# EAGLE board board comp 2-27-12 (EAGLE 6.3), part 1 of 2
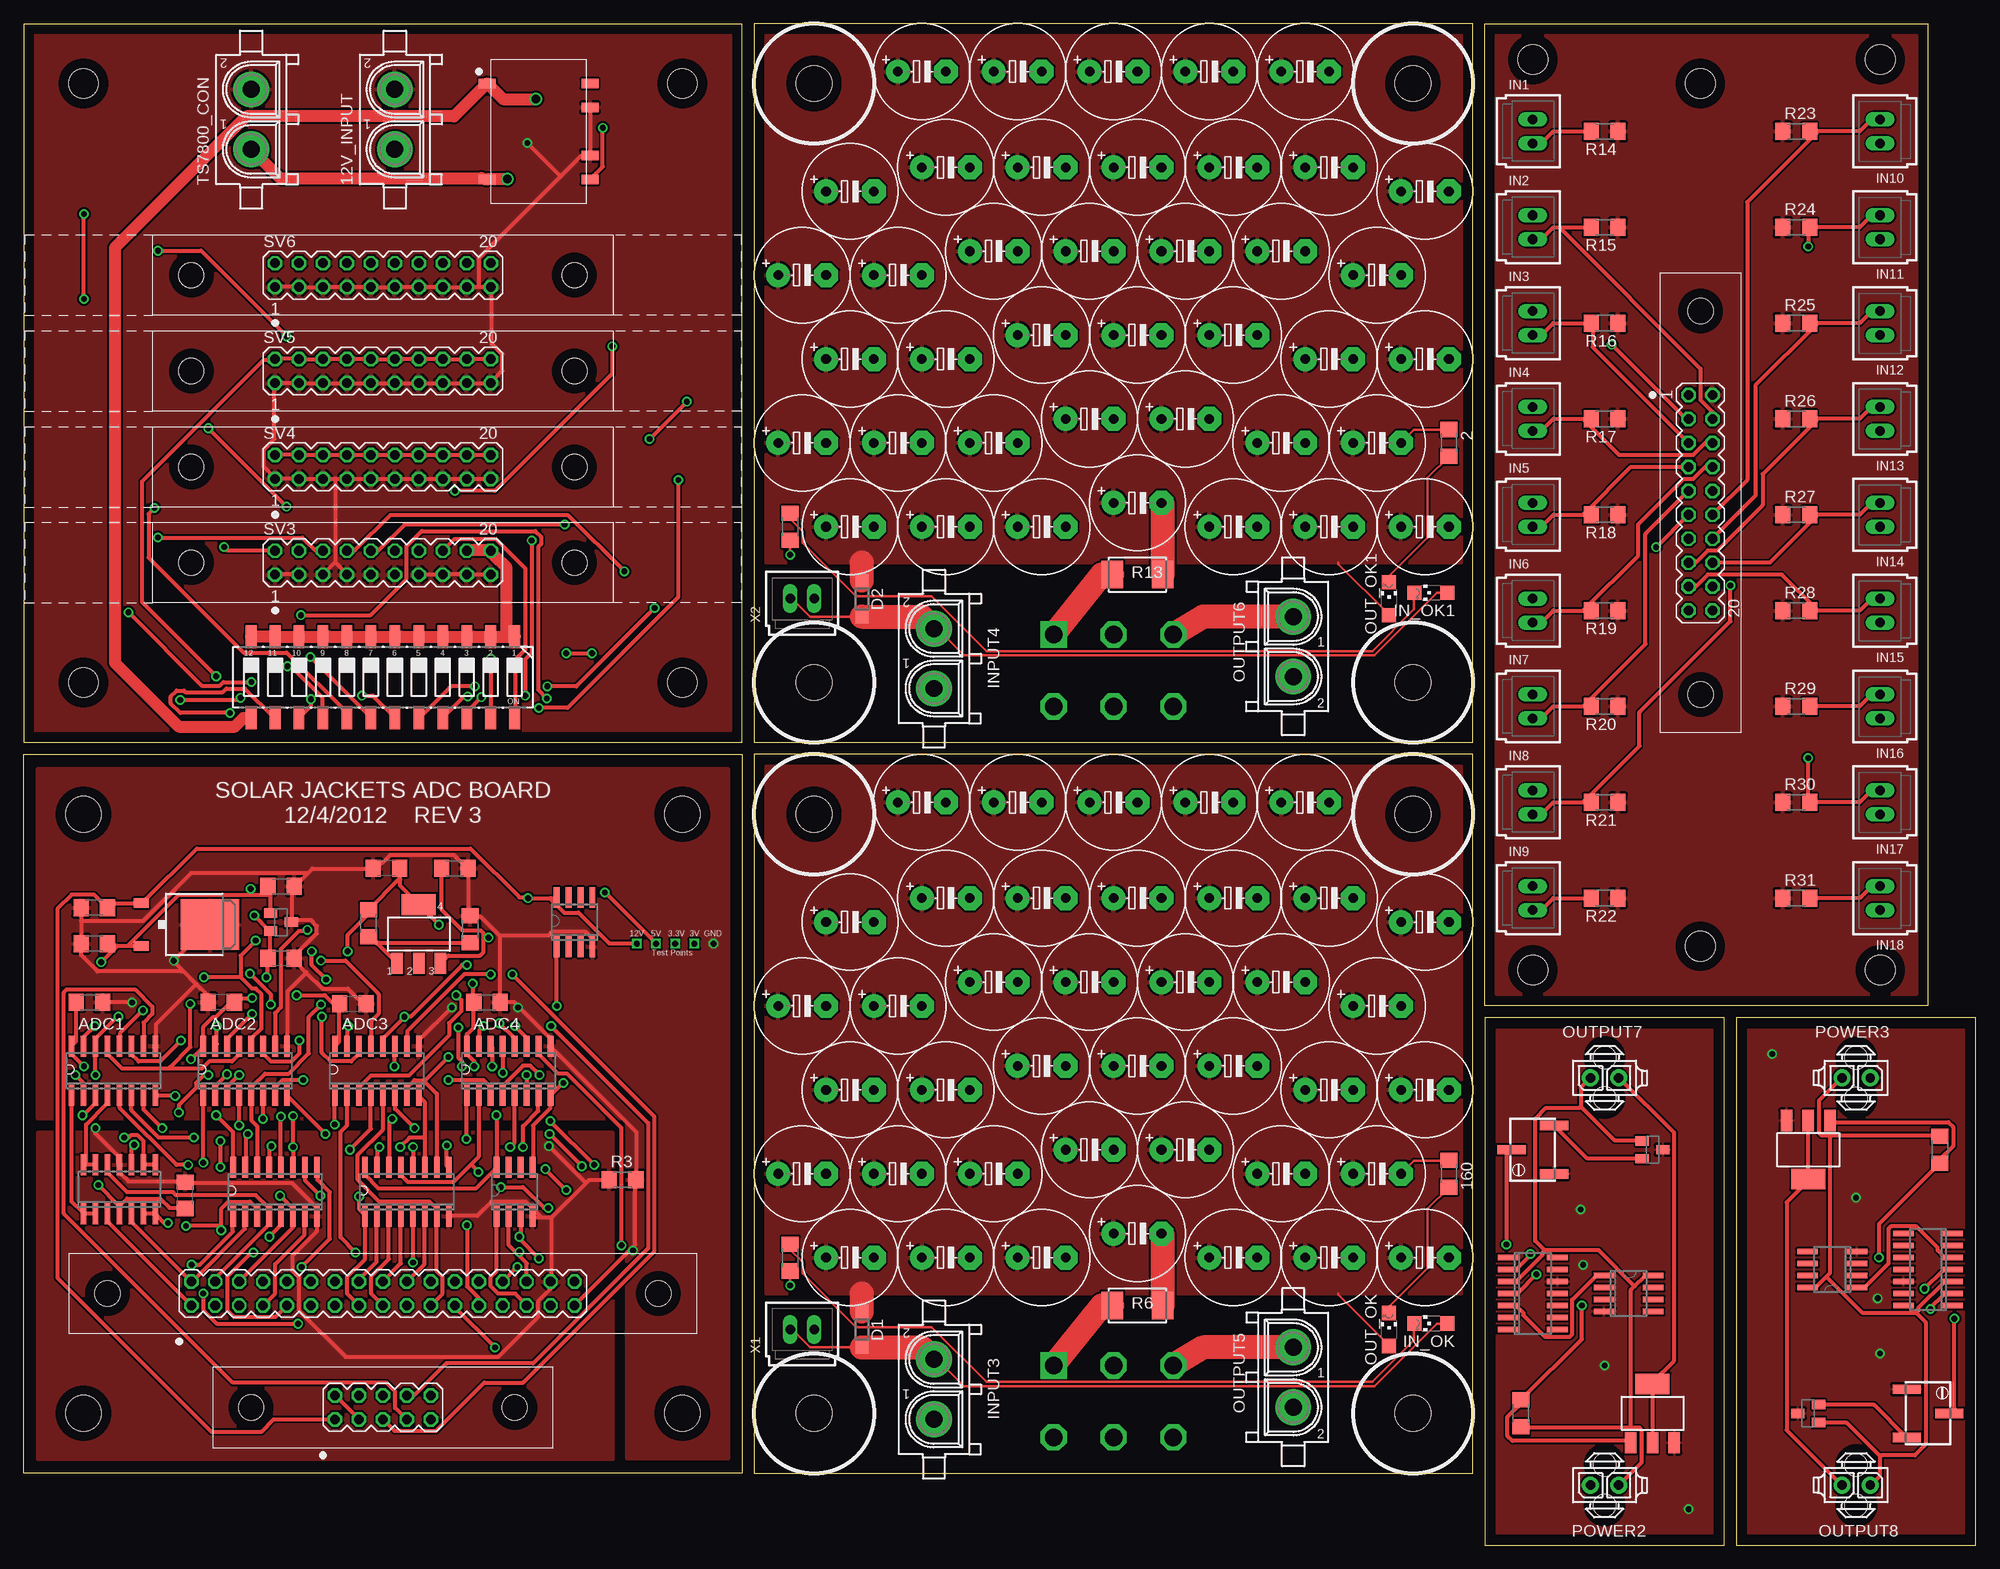
[diagram p0: board, top side]
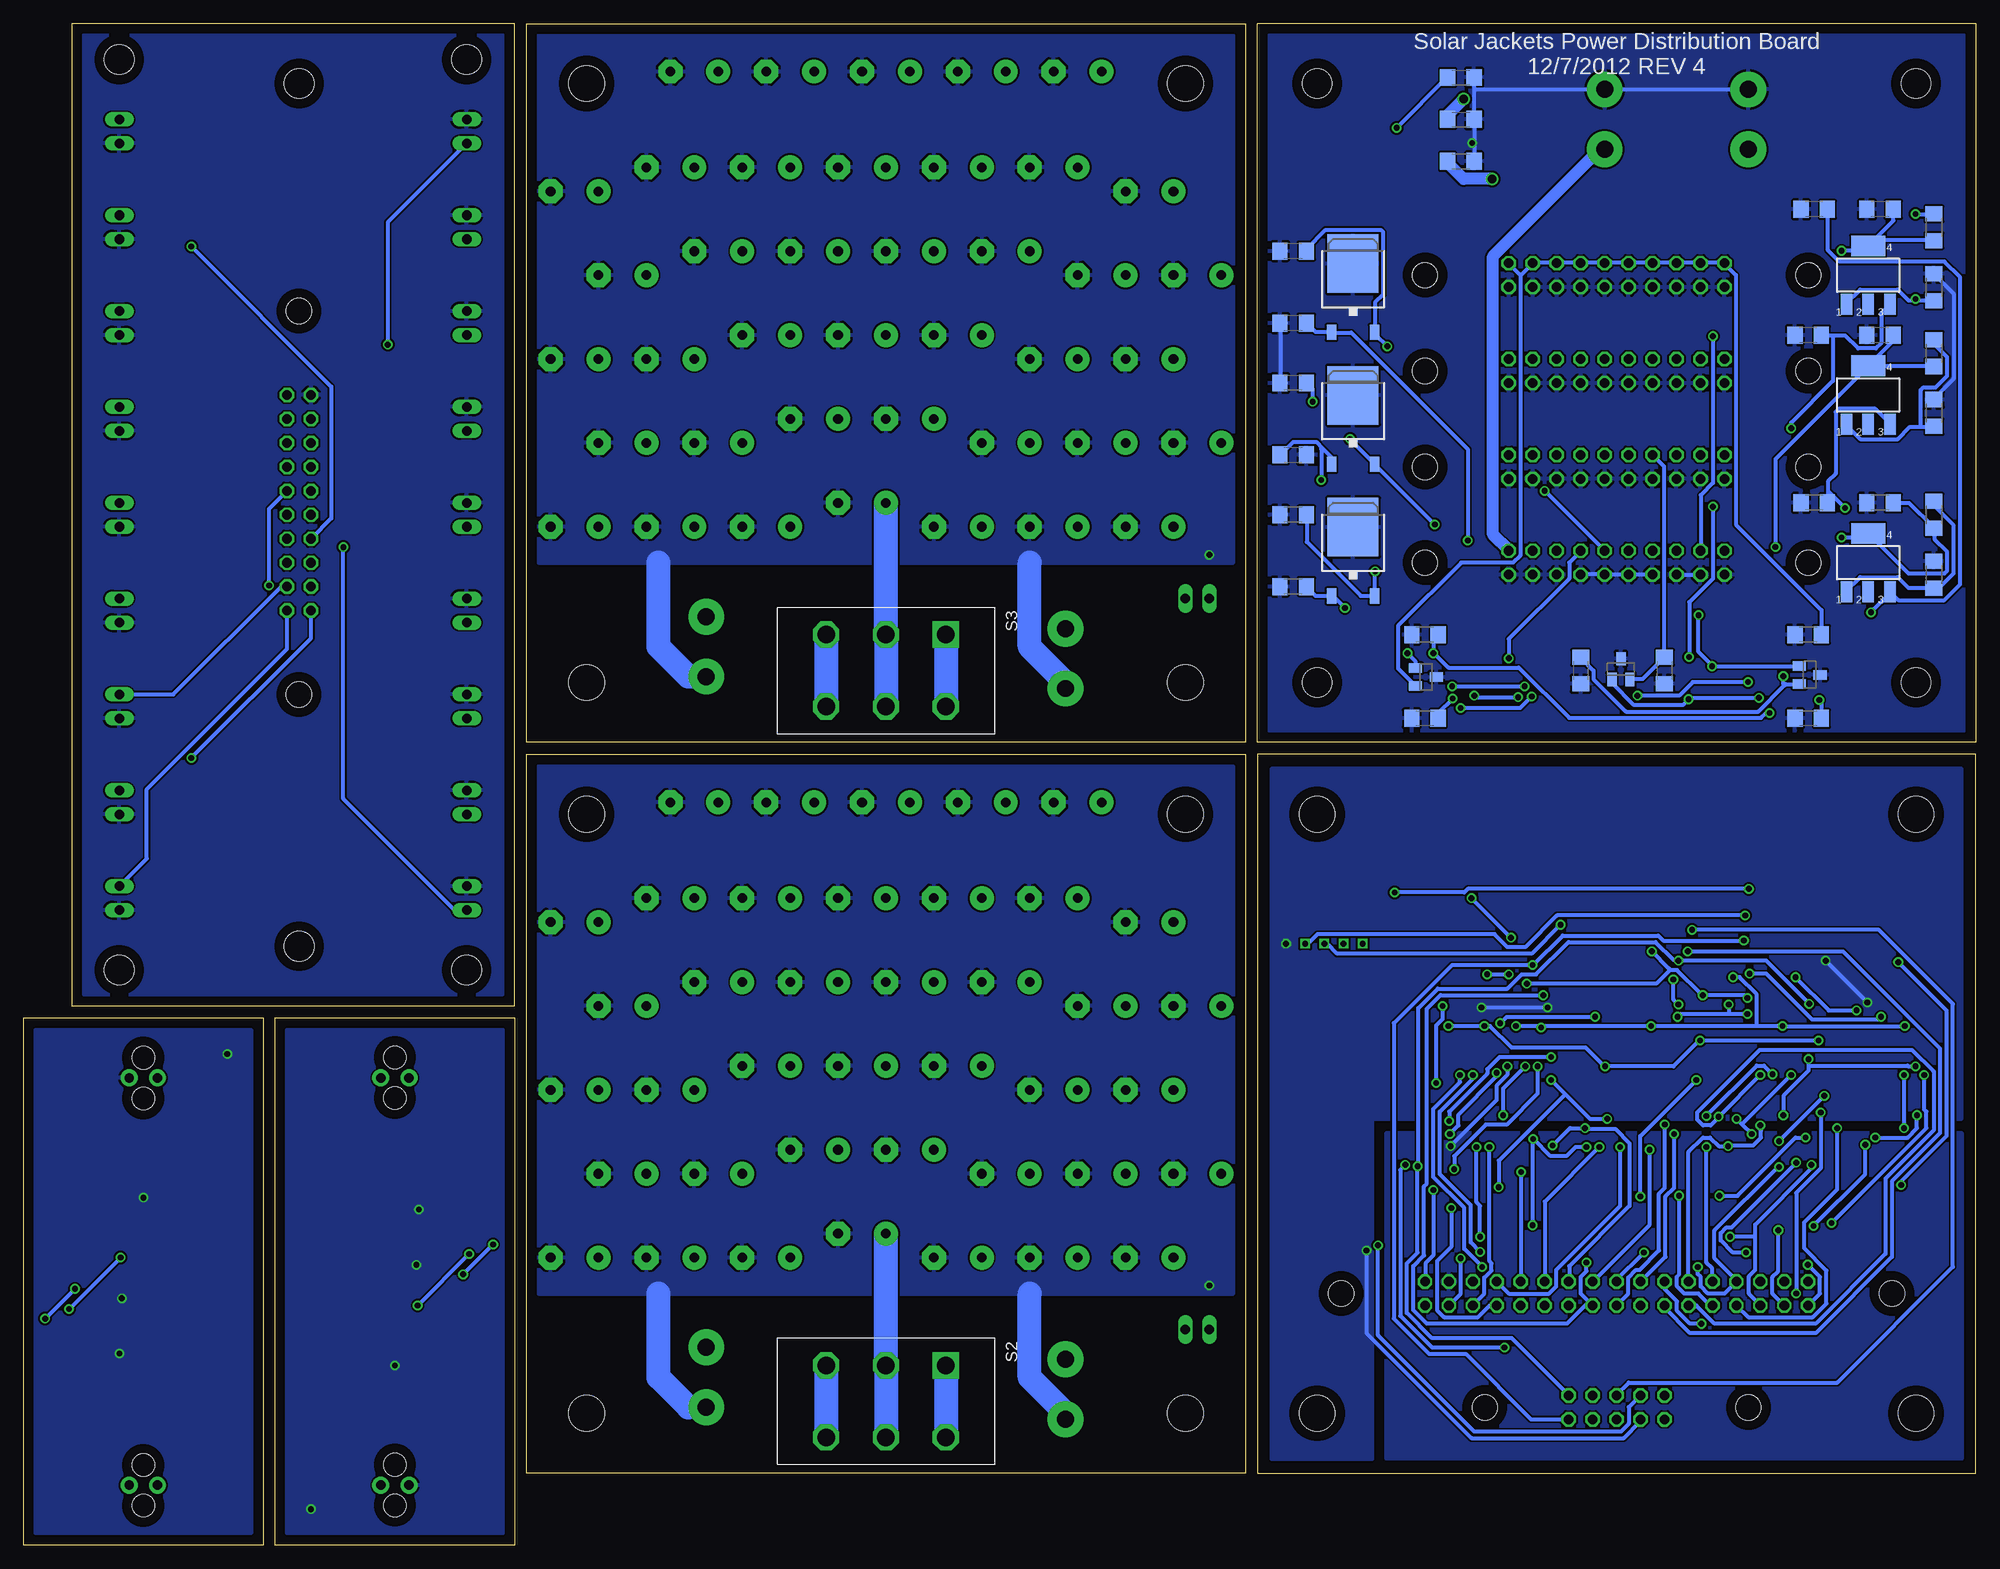
[diagram p1: board, bottom side, seen from below]

Size 207.01 x 161.29 mm. Coordinates in mm from the lower left corner, seen from the top.
Outline: 0,7.62 0,83.82 76.2,83.82 76.2,7.62 0,7.62
Outline: 76.2,85.09 76.2,161.29 0,161.29 0,85.09 76.2,85.09
Outline: 77.47,7.62 153.67,7.62 153.67,83.82 77.47,83.82 77.47,7.62
Outline: 77.47,85.09 153.67,85.09 153.67,161.29 77.47,161.29 77.47,85.09
Outline: 154.94,57.15 154.94,161.29 201.93,161.29 201.93,57.15 154.94,57.15
Outline: 154.94,55.88 154.94,0 180.34,0 180.34,55.88 154.94,55.88
Outline: 207.01,0 207.01,55.88 181.61,55.88 181.61,0 207.01,0
Copper layers (1*16): Top 0.035mm / dielectric 1.5mm / Bottom 0.035mm
Design rules "default": minimum track width 10mil, minimum drill 24mil, track to track 8mil, track to pad 8mil, pad to pad 8mil, via to via 8mil, smd to smd 8mil, copper to edge 40mil, drill to drill 8mil, minimum pad ring 10mil, minimum via ring 8mil, stop-mask expansion 4mil, vias tented up to drill 0mil, thermal gap 10mil
Net classes: 1 power: width 1.27 mm, drill 0.889 mm
Holes 3.81 mm at 69.85,77.47 6.35,77.47 69.85,13.97 6.35,13.97 83.82,13.97 83.82,77.47 147.32,77.47 147.32,13.97 83.82,91.44 83.82,154.94 147.32,154.94 147.32,91.44
Holes 3.17 mm at 69.85,91.44 6.35,91.44 6.35,154.94 69.85,154.94 160.02,60.96 196.85,60.96 160.02,157.48 196.85,157.48 177.8,154.94 177.8,63.5

## Footprints (pad centres in the part's own frame; a part is rotated, then mirrored left to right if it is on the bottom)
R1206 = smd 1.6 x 1.803: 1 -1.422,0; 2 1.422,0
SOT23 = smd 1 x 1.4: 1 -0.95,-1.1; 2 0.95,-1.1; 3 0,1.1
TO252 = smd 1 x 1.6: 1 -2.28,-4.8; 2 2.28,-4.8 | smd 5.4 x 6.2: 3 0,2.5
350759-4 = drill 1.8 pad 3.81: 1 -3.175,0; 2 3.175,0
C1206 = smd 1.6 x 1.8: 1 -1.4,0; 2 1.4,0
SO16 = smd 0.6 x 2.2: 1 -4.445,-2.6; 2 -3.175,-2.6; 3 -1.905,-2.6; 4 -0.635,-2.6; 5 0.635,-2.6; 6 1.905,-2.6; 7 3.175,-2.6; 8 4.445,-2.6; 9 4.445,2.6; 10 3.175,2.6; 11 1.905,2.6; 12 0.635,2.6; 13 -0.635,2.6; 14 -1.905,2.6; 15 -3.175,2.6; 16 -4.445,2.6
E5-10,5 = drill 1.016 pad 2.54: + -2.54,0 | drill 1.016 pad 2.54 octagon: - 2.54,0
SOD123 = smd 1.4 x 1.4: A 1.9,0; C -1.9,0
SOT223 = smd 1.219 x 2.235: 1 -2.311,-3.099; 2 0,-3.099; 3 2.311,-3.099 | smd 3.6 x 2.2: 4 0,3.099
SO14 = smd 0.6 x 2.2: 1 -3.81,-2.6; 2 -2.54,-2.6; 3 -1.27,-2.6; 4 0,-2.6; 5 1.27,-2.6; 6 2.54,-2.6; 7 3.81,-2.6; 8 3.81,2.6; 9 2.54,2.6; 10 1.27,2.6; 11 0,2.6; 12 -1.27,2.6; 13 -2.54,2.6; 14 -3.81,2.6
70543-02 = drill 1.016 long: 1 -1.27,0; 2 1.27,0
CHIPLED_1206 = smd 1.5 x 1.5: A 0,-1.75; C 0,1.75
350428-1 = drill 1.8 pad 3.81: 1 -3.175,0; 2 3.175,0
794681-2 = drill 1 pad 1.778: 1 0,-1.5; 2 0,1.5 | hole 2.4: 2.13,0; -2.17,0
WSC2515 = smd 2.29 x 2.92: 1 -2.675,0; 2 2.675,0
RTRIMTS63Y = smd 1 x 3: 1 -2.55,-2.25; 2 0,2.25; 3 2.55,-2.25
CTS-219-12 = smd 1.13 x 2.44: 1 -13.97,-4.3; 2 -11.43,-4.3; 3 -8.89,-4.3; 4 -6.35,-4.3; 5 -3.81,-4.3; 6 -1.27,-4.3; 7 1.27,-4.3; 8 3.81,-4.3; 9 6.35,-4.3; 10 8.89,-4.3; 11 11.43,-4.3; 12 13.97,-4.3; 13 13.97,4.3; 14 11.43,4.3; 15 8.89,4.3; 16 6.35,4.3; 17 3.81,4.3; 18 1.27,4.3; 19 -1.27,4.3; 20 -3.81,4.3; 21 -6.35,4.3; 22 -8.89,4.3; 23 -11.43,4.3; 24 -13.97,4.3
SLIDE_SWITCH = drill 1.854 square: 1 -3.81,6.35 | drill 1.854 octagon: 2 -3.81,0; 3 -3.81,-6.35; 4 3.81,-6.35; 5 3.81,0; 6 3.81,6.35
MA17-2 = drill 1.016 octagon: 1 -20.32,-1.27; 2 -20.32,1.27; 3 -17.78,-1.27; 4 -17.78,1.27; 5 -15.24,-1.27; 6 -15.24,1.27; 7 -12.7,-1.27; 8 -12.7,1.27; 9 -10.16,-1.27; 10 -10.16,1.27; 11 -7.62,-1.27; 12 -7.62,1.27; 13 -5.08,-1.27; 14 -5.08,1.27; 15 -2.54,-1.27; 16 -2.54,1.27; 17 0,-1.27; 18 0,1.27; 19 2.54,-1.27; 20 2.54,1.27; 21 5.08,-1.27; 22 5.08,1.27; 23 7.62,-1.27; 24 7.62,1.27; 25 10.16,-1.27; 26 10.16,1.27; 27 12.7,-1.27; 28 12.7,1.27; 29 15.24,-1.27; 30 15.24,1.27; 31 17.78,-1.27; 32 17.78,1.27; 33 20.32,-1.27; 34 20.32,1.27 | hole 2.692: -29.21,0; 29.21,0
MA05-2 = drill 1.016 octagon: 1 -5.08,-1.27; 2 -5.08,1.27; 3 -2.54,-1.27; 4 -2.54,1.27; 5 0,-1.27; 6 0,1.27; 7 2.54,-1.27; 8 2.54,1.27; 9 5.08,-1.27; 10 5.08,1.27 | hole 2.692: -13.97,0; 13.97,0
MA10-2 = drill 1.016 octagon: 1 -11.43,-1.27; 2 -11.43,1.27; 3 -8.89,-1.27; 4 -8.89,1.27; 5 -6.35,-1.27; 6 -6.35,1.27; 7 -3.81,-1.27; 8 -3.81,1.27; 9 -1.27,-1.27; 10 -1.27,1.27; 11 1.27,-1.27; 12 1.27,1.27; 13 3.81,-1.27; 14 3.81,1.27; 15 6.35,-1.27; 16 6.35,1.27; 17 8.89,-1.27; 18 8.89,1.27; 19 11.43,-1.27; 20 11.43,1.27 | hole 2.692: -20.32,0; 20.32,0
V7805 = smd 0.991 x 1.803: 1 0,0.902; 5 10.16,0.902; 6 10.16,11.798; 7 7.62,11.798; 9 2.54,11.798; 10 0,11.798
SO-08 = smd 0.6 x 2.2: 1 -1.905,-2.6; 2 -0.635,-2.6; 3 0.635,-2.6; 4 1.905,-2.6; 5 1.905,2.6; 6 0.635,2.6; 7 -0.635,2.6; 8 -1.905,2.6

## Placement (x,y rotation side)
1  160  [R1206]  81.28,30.48 90 top
2  [R1206]  151.13,116.84 270 top
3  160  [R1206]  81.28,107.95 90 top
3V  MAX6103  [SOT23]  27.3,66.04 270 top
3V3  MAX6103  [SOT23]  17.63,92.25 270 bottom
3V4  MAX6103  [SOT23]  37.64,92.86 0 bottom
3V5  MAX6103  [SOT23]  58.32,92.02 270 bottom
5V  LM7805TV  [TO252]  17.27,65.79 270 top
12V_INPUT  350759-4  [350759-4]  39.37,151.13 90 top
160  [R1206]  151.13,39.37 270 top
317CAP1  .33uF  [C1206]  45.72,71.76 0 top
317CAP2  1uF  [C1206]  38.48,71.76 180 top
317CAP3  .33uF  [C1206]  17.14,141.61 180 bottom
317CAP8  1uF  [C1206]  10.16,110.49 180 bottom
317CAP9  .33uF  [C1206]  17.78,128.27 180 bottom
317CAP10  1uF  [C1206]  10.16,141.61 180 bottom
317CAP11  .33uF  [C1206]  17.14,110.49 180 bottom
317CAP12  1uF  [C1206]  10.16,128.27 180 bottom
6103CAP1  1uF  [C1206]  27.3,69.85 0 top
6103CAP2  1uF  [C1206]  27.3,62.23 0 top
6103CAP7  1uF  [C1206]  58.42,87.63 180 bottom
6103CAP8  1uF  [C1206]  41.91,92.71 270 bottom
6103CAP9  1uF  [C1206]  17.78,87.63 180 bottom
6103CAP10  1uF  [C1206]  33.02,92.71 270 bottom
6103CAP11  1uF  [C1206]  58.42,96.52 180 bottom
6103CAP12  1uF  [C1206]  17.78,96.52 180 bottom
6484CAP1  .1uF  [C1206]  17.14,37.08 90 top
7805CAP1  .33uF  [C1206]  7.49,67.56 180 top
7805CAP2  1uF  [C1206]  7.49,63.75 180 top
ADC1  MCP-3008  [SO16]  9.53,50.29 0 top
ADC2  MCP-3008  [SO16]  23.5,50.29 0 top
ADC3  MCP-3008  [SO16]  37.47,50.29 0 top
ADC4  MCP-3008  [SO16]  51.44,50.29 0 top
ADC_CAP1  .1uF  [C1206]  6.99,57.53 0 top
ADC_CAP2  .1uF  [C1206]  20.95,57.53 180 top
ADC_CAP3  .1uF  [C1206]  34.92,57.4 0 top
ADC_CAP4  .1uF  [C1206]  49.15,57.53 0 top
C1  1uF  [C1206]  72.39,129.54 180 bottom
C2  1uF  [C1206]  72.39,137.16 180 bottom
C3  1uF  [C1206]  72.39,115.57 0 bottom
C4  1uF  [C1206]  72.39,123.19 180 bottom
C5  1uF  [C1206]  72.39,101.6 180 bottom
C6  1uF  [C1206]  72.39,109.22 180 bottom
C34  [E5-10,5]  95.25,78.74 0 top
C35  [E5-10,5]  105.41,78.74 0 top
C36  [E5-10,5]  115.57,78.74 0 top
C37  [E5-10,5]  125.73,78.74 0 top
C38  [E5-10,5]  135.89,78.74 0 top
C39  [E5-10,5]  148.59,66.04 0 top
C40  [E5-10,5]  138.43,68.58 0 top
C41  [E5-10,5]  128.27,68.58 0 top
C42  [E5-10,5]  118.11,68.58 0 top
C43  [E5-10,5]  107.95,68.58 0 top
C44  [E5-10,5]  97.79,68.58 0 top
C45  [E5-10,5]  87.63,66.04 0 top
C46  [E5-10,5]  82.55,57.15 0 top
C47  [E5-10,5]  92.71,57.15 0 top
C48  [E5-10,5]  102.87,59.69 0 top
C49  [E5-10,5]  113.03,59.69 0 top
C50  [E5-10,5]  123.19,59.69 0 top
C51  [E5-10,5]  133.35,59.69 0 top
C52  [E5-10,5]  143.51,57.15 0 top
C53  [E5-10,5]  148.59,48.26 0 top
C54  [E5-10,5]  138.43,48.26 0 top
C55  [E5-10,5]  128.27,50.8 0 top
C56  [E5-10,5]  118.11,50.8 0 top
C57  [E5-10,5]  107.95,50.8 0 top
C58  [E5-10,5]  97.79,48.26 0 top
C59  [E5-10,5]  87.63,48.26 0 top
C60  [E5-10,5]  82.55,39.37 0 top
C61  [E5-10,5]  92.71,39.37 0 top
C62  [E5-10,5]  102.87,39.37 0 top
C63  [E5-10,5]  113.03,41.91 0 top
C64  [E5-10,5]  123.19,41.91 0 top
C65  [E5-10,5]  133.35,39.37 0 top
C66  [E5-10,5]  143.51,39.37 0 top
C67  [E5-10,5]  148.59,30.48 0 top
C68  [E5-10,5]  138.43,30.48 0 top
C69  [E5-10,5]  128.27,30.48 0 top
C70  [E5-10,5]  118.11,33.02 0 top
C71  [E5-10,5]  107.95,30.48 0 top
C72  [E5-10,5]  97.79,30.48 0 top
C73  [E5-10,5]  87.63,30.48 0 top
C74  [E5-10,5]  95.25,156.21 0 top
C75  [E5-10,5]  105.41,156.21 0 top
C76  [E5-10,5]  115.57,156.21 0 top
C77  [E5-10,5]  125.73,156.21 0 top
C78  [E5-10,5]  135.89,156.21 0 top
C79  [E5-10,5]  148.59,143.51 0 top
C80  [E5-10,5]  138.43,146.05 0 top
C81  [E5-10,5]  128.27,146.05 0 top
C82  [E5-10,5]  118.11,146.05 0 top
C83  [E5-10,5]  107.95,146.05 0 top
C84  [E5-10,5]  97.79,146.05 0 top
C85  [E5-10,5]  87.63,143.51 0 top
C86  [E5-10,5]  82.55,134.62 0 top
C87  [E5-10,5]  92.71,134.62 0 top
C88  [E5-10,5]  102.87,137.16 0 top
C89  [E5-10,5]  113.03,137.16 0 top
C90  [E5-10,5]  123.19,137.16 0 top
C91  [E5-10,5]  133.35,137.16 0 top
C92  [E5-10,5]  143.51,134.62 0 top
C93  [E5-10,5]  148.59,125.73 0 top
C94  [E5-10,5]  138.43,125.73 0 top
C95  [E5-10,5]  128.27,128.27 0 top
C96  [E5-10,5]  118.11,128.27 0 top
C97  [E5-10,5]  107.95,128.27 0 top
C98  [E5-10,5]  97.79,125.73 0 top
C99  [E5-10,5]  87.63,125.73 0 top
C100  [E5-10,5]  82.55,116.84 0 top
C101  [E5-10,5]  92.71,116.84 0 top
C102  [E5-10,5]  102.87,116.84 0 top
C103  [E5-10,5]  113.03,119.38 0 top
C104  [E5-10,5]  123.19,119.38 0 top
C105  [E5-10,5]  133.35,116.84 0 top
C106  [E5-10,5]  143.51,116.84 0 top
C107  [E5-10,5]  148.59,107.95 0 top
C108  [E5-10,5]  138.43,107.95 0 top
C109  [E5-10,5]  128.27,107.95 0 top
C110  [E5-10,5]  118.11,110.49 0 top
C111  [E5-10,5]  107.95,107.95 0 top
C112  [E5-10,5]  97.79,107.95 0 top
C113  [E5-10,5]  87.63,107.95 0 top
D1  [SOD123]  88.9,22.86 270 top
D2  [SOD123]  88.9,100.33 270 top
IC2  LM317  [SOT223]  41.91,64.77 0 top
IC4  LM317  [SOT223]  11.43,104.14 0 bottom
IC5  LM317  [SOT223]  11.43,134.62 0 bottom
IC6  LM317  [SOT223]  11.43,121.92 0 bottom
IC10  LM339D  [SO14]  160.02,26.67 270 top
IC11  LM339D  [SO14]  201.93,29.21 90 top
IN1  C-GRID-02-70543  [70543-02]  160.02,149.86 270 top
IN2  C-GRID-02-70543  [70543-02]  160.02,139.7 270 top
IN3  C-GRID-02-70543  [70543-02]  160.02,129.54 270 top
IN4  C-GRID-02-70543  [70543-02]  160.02,119.38 270 top
IN5  C-GRID-02-70543  [70543-02]  160.02,109.22 270 top
IN6  C-GRID-02-70543  [70543-02]  160.02,99.06 270 top
IN7  C-GRID-02-70543  [70543-02]  160.02,88.9 270 top
IN8  C-GRID-02-70543  [70543-02]  160.02,78.74 270 top
IN9  C-GRID-02-70543  [70543-02]  160.02,68.58 270 top
IN10  C-GRID-02-70543  [70543-02]  196.85,149.86 90 top
IN11  C-GRID-02-70543  [70543-02]  196.85,139.7 90 top
IN12  C-GRID-02-70543  [70543-02]  196.85,129.54 90 top
IN13  C-GRID-02-70543  [70543-02]  196.85,119.38 90 top
IN14  C-GRID-02-70543  [70543-02]  196.85,109.22 90 top
IN15  C-GRID-02-70543  [70543-02]  196.85,99.06 90 top
IN16  C-GRID-02-70543  [70543-02]  196.85,88.9 90 top
IN17  C-GRID-02-70543  [70543-02]  196.85,78.74 90 top
IN18  C-GRID-02-70543  [70543-02]  196.85,68.58 90 top
IN_OK  [CHIPLED_1206]  149.22,23.5 90 top
IN_OK1  [CHIPLED_1206]  149.22,100.97 90 top
INPUT3  350428-1  [350428-1]  96.52,16.51 90 top
INPUT4  350428-1  [350428-1]  96.52,93.98 90 top
LMC6484_1  LMC6484  [SO14]  10.16,37.72 0 top
OUT_OK  [CHIPLED_1206]  144.78,22.86 0 top
OUT_OK1  [CHIPLED_1206]  144.78,100.33 0 top
OUTPUT5  350428-1  [350428-1]  134.62,17.78 270 top
OUTPUT6  350428-1  [350428-1]  134.62,95.25 270 top
OUTPUT7  794681-2  [794681-2]  167.64,49.53 270 top
OUTPUT8  794681-2  [794681-2]  194.31,6.35 90 top
POWER2  794681-2  [794681-2]  167.64,6.35 270 top
POWER3  794681-2  [794681-2]  194.31,49.53 90 top
PWR_1  7805DT  [TO252]  66.04,133.35 0 bottom
PWR_2  7805DT  [TO252]  66.04,119.38 0 bottom
PWR_3  7805DT  [TO252]  66.04,105.41 0 bottom
R1  220  [R1206]  36.58,65.91 270 top
R2  361  [R1206]  47.37,65.28 90 top
R3  0  [R1206]  63.5,38.73 0 top
R6  [WSC2515]  118.11,25.4 0 top
R7  220  [R1206]  4.45,109.22 90 bottom
R8  361  [R1206]  4.45,102.87 90 bottom
R9  220  [R1206]  4.45,139.7 90 bottom
R10  361  [R1206]  4.45,133.35 90 bottom
R11  220  [R1206]  4.45,126.37 90 bottom
R12  361  [R1206]  4.45,120.02 90 bottom
R13  [WSC2515]  118.11,102.87 0 top
R14  1K  [R1206]  167.64,149.86 180 top
R15  1K  [R1206]  167.64,139.7 180 top
R16  1K  [R1206]  167.64,129.54 180 top
R17  1K  [R1206]  167.64,119.38 180 top
R18  1K  [R1206]  167.64,109.22 180 top
R19  1K  [R1206]  167.64,99.06 180 top
R20  1K  [R1206]  167.64,88.9 180 top
R21  1K  [R1206]  167.64,78.74 180 top
R22  1K  [R1206]  167.64,68.58 180 top
R23  1K  [R1206]  187.96,149.86 0 top
R24  1K  [R1206]  187.96,139.7 0 top
R25  1K  [R1206]  187.96,129.54 0 top
R26  1K  [R1206]  187.96,119.38 0 top
R27  1K  [R1206]  187.96,109.22 0 top
R28  1K  [R1206]  187.96,99.06 0 top
R29  1K  [R1206]  187.96,88.9 0 top
R30  1K  [R1206]  187.96,78.74 0 top
R31  1K  [R1206]  187.96,68.58 0 top
R32  10k  [RTRIMTS63Y]  160.02,41.91 90 top
R33  10k  [RTRIMTS63Y]  201.93,13.97 270 top
S1  219-12  [CTS-219-12]  38.1,92 180 top
S2  [SLIDE_SWITCH]  115.57,15.24 270 bottom
S3  [SLIDE_SWITCH]  115.57,92.71 270 bottom
SV1  [MA17-2]  38.1,26.67 0 top
SV2  AMP_LATCH_10  [MA05-2]  38.1,14.61 0 top
SV3  AMPLATCH-20  [MA10-2]  38.1,104.14 0 top
SV4  AMPLATCH-20  [MA10-2]  38.1,114.3 0 top
SV5  AMPLATCH-20  [MA10-2]  38.1,124.46 0 top
SV6  AMPLATCH-20  [MA10-2]  38.1,134.62 0 top
TS7800_CON  350759-4  [350759-4]  24.13,151.13 90 top
U$1  V7805  [V7805]  48.26,154.94 270 top
U$2  LM35  [SO-08]  58.42,66.04 0 top
U$6  SP720APP  [SO16]  26.67,37.46 0 top
U$7  SP720APP  [SO16]  40.64,37.46 0 top
U$8  SP721APP  [SO-08]  52.07,37.46 0 top
U$14  AMP_LATCH-20  [MA10-2]  177.8,110.49 270 top
U$15  100  [R1206]  158.75,13.97 270 top
U$16  MAX6103  [SOT23]  172.72,41.91 270 top
U$17  NDT3055  [SOT223]  172.72,13.97 0 top
U$18  LM35  [SO-08]  170.18,26.67 270 top
U$19  100  [R1206]  203.2,41.91 90 top
U$20  MAX6103  [SOT23]  189.23,13.97 90 top
U$21  NDT3055  [SOT223]  189.23,41.91 180 top
U$22  LM35  [SO-08]  191.77,29.21 90 top
V7805_C4  1uF  [C1206]  54.61,155.58 0 bottom
V7805_C5  1uF  [C1206]  54.61,151.13 0 bottom
V7805_C6  1uF  [C1206]  54.61,146.69 0 bottom
X1  C-GRID-02-70543  [70543-02]  82.55,22.86 0 top
X2  C-GRID-02-70543  [70543-02]  82.55,100.33 0 top

## Library data of the parts
1-3 160 317CAP1-317CAP3 317CAP8-317CAP12 6103CAP1 6103CAP2 6103CAP7-6103CAP12 6484CAP1 7805CAP1 7805CAP2 ADC_CAP1-ADC_CAP4 C1-C6 C34-C113 R1-R3 R6-R31 V7805_C4-V7805_C6 = rcl
3V 3V3-3V5 ADC1-ADC4 LMC6484_1 U$2 U$6-U$8 U$15 U$16 U$18-U$20 U$22 = SolarJacketsADC
5V IC2 IC4-IC6 IC10 IC11 PWR_1-PWR_3 = linear
12V_INPUT INPUT3 INPUT4 OUTPUT5-OUTPUT8 POWER2 POWER3 = con-amp
D1 D2 = diode
IN1-IN18 X1 X2 = con-molex; OC_FARNELL: unknown; OC_NEWARK: unknown
IN_OK IN_OK1 OUT_OK OUT_OK1 = led
R32 R33 = resistor
S1 = switch-dil; OC_FARNELL: unknown; OC_NEWARK: unknown
S2 S3 = SolarJackets_Common
SV1 = SolarJacketsADC; OC_FARNELL: unknown; OC_NEWARK: unknown
SV2 = SolarJacketsADC; PART_NUM: 5499922-1
SV3-SV6 = SolarJacketsADC; PART_NUM: 5499160-1
TS7800_CON = con-amp; NEG: -; POS: +
U$1 = V7805
U$14 = SolarJackets_Common; PART_NUM: 5499160-1
U$17 U$21 = SolarJacketsADC; PART_NUM: NDT3055

## Nets
3.3V: 317CAP2.1 ADC1.16 ADC2.16 ADC3.16 ADC4.16 ADC_CAP1.1 ADC_CAP2.1 ADC_CAP3.1 ADC_CAP4.1 IC2.4 R1.1 U$6.16 U$7.16 U$8.8
3.3V1: 317CAP8.1 IC4.4 R7.1 SV3.6
3.3V1_EN: 317CAP3.1 IC4.3 S1.19
3.3V2: 317CAP10.1 IC5.4 R9.1 SV3.4
3.3V2_EN: 317CAP9.1 IC5.3 S1.18
3.3V3: 317CAP12.1 IC6.4 R11.1 SV3.2
3.3V3_EN: 317CAP11.1 IC6.3 S1.17
3.3V7: IN1.1 IN2.1 IN3.1 IN4.1 IN5.1 IN6.1 IN7.1 IN8.1 IN9.1 IN10.1 IN11.1 IN12.1 IN13.1 IN14.1 IN15.1 IN16.1 IN17.1 IN18.1 U$14.1
5V: 3V.1 5V.2 6103CAP1.1 6484CAP1.1 7805CAP2.1 LMC6484_1.4
5V1: C2.1 PWR_1.2 SV3.12
5V1_EN: C1.1 PWR_1.1 S1.22
5V2: C4.1 PWR_2.2 SV3.10
5V2_EN: C3.1 PWR_2.1 S1.21
5V3: C6.1 PWR_3.2 SV3.8
5V3_EN: C5.1 PWR_3.1 S1.20
5V4: C34.+ C35.+ C36.+ C37.+ C38.+ C39.+ C40.+ C41.+ C42.+ C43.+ C44.+ C45.+ C46.+ C47.+ C48.+ C49.+ C50.+ C51.+ C52.+ C53.+ C54.+ C55.+ C56.+ C57.+ C58.+ C59.+ C60.+ C61.+ C62.+ C63.+ C64.+ C65.+ C66.+ C67.+ C68.+ C69.+ C70.+ C71.+ C72.+ C73.+ D1.C OUT_OK.A S2.2 S2.5
5V5: C74.+ C75.+ C76.+ C77.+ C78.+ C79.+ C80.+ C81.+ C82.+ C83.+ C84.+ C85.+ C86.+ C87.+ C88.+ C89.+ C90.+ C91.+ C92.+ C93.+ C94.+ C95.+ C96.+ C97.+ C98.+ C99.+ C100.+ C101.+ C102.+ C103.+ C104.+ C105.+ C106.+ C107.+ C108.+ C109.+ C110.+ C111.+ C112.+ C113.+ D2.C OUT_OK1.A S3.2 S3.5
12V: 5V.1 317CAP1.1 7805CAP1.1 IC2.3 SV2.1 U$2.8
12V1 [power]: 12V_INPUT.1 S1.1 S1.2 S1.3 S1.4 S1.5 S1.6 S1.7 S1.8 S1.9 S1.10 S1.11 S1.12 SV3.18 SV3.20
12V1_EN: S1.24 SV3.16
12V2_EN: S1.23 SV3.14
12V4: IC10.3 OUTPUT7.1 POWER2.2 U$15.2 U$16.1 U$18.8
12V5: IC11.3 OUTPUT8.1 POWER3.2 U$19.2 U$20.1 U$22.8
A1: ADC1.1 LMC6484_1.1 LMC6484_1.2
A2: ADC1.2 LMC6484_1.6 LMC6484_1.7
A3: ADC1.3 LMC6484_1.8 LMC6484_1.9
A4: ADC1.4 LMC6484_1.13 LMC6484_1.14
AGND: 6484CAP1.2 ADC1.14 ADC2.14 ADC3.14 ADC4.14 LMC6484_1.11 R3.1 SV1.32 U$6.8 U$7.8 U$8.4
GND: 3V.3 5V.3 317CAP1.2 317CAP2.2 6103CAP1.2 6103CAP2.2 7805CAP1.2 7805CAP2.2 ADC1.9 ADC2.9 ADC3.9 ADC4.9 ADC_CAP1.2 ADC_CAP2.2 ADC_CAP3.2 ADC_CAP4.2 R2.2 R3.2 SV1.33 SV2.2 SV2.3 U$2.4
GND1: 3V3.3 3V4.3 3V5.3 12V_INPUT.2 317CAP3.2 317CAP8.2 317CAP9.2 317CAP10.2 317CAP11.2 317CAP12.2 6103CAP7.2 6103CAP8.2 6103CAP9.2 6103CAP10.2 6103CAP11.2 6103CAP12.2 C1.2 C2.2 C3.2 C4.2 C5.2 C6.2 PWR_1.3 PWR_2.3 PWR_3.3 R8.2 R10.2 R12.2 SV3.1 SV3.3 SV3.5 SV3.7 SV3.9 SV3.11 SV3.13 SV3.15 SV3.17 SV3.19 SV4.1 SV4.3 SV4.5 SV4.7 SV4.9 SV4.11 SV4.13 SV4.15 SV4.17 SV4.19 SV5.1 SV5.3 SV5.5 SV5.7 SV5.9 SV5.11 SV5.13 SV5.15 SV5.17 SV5.19 SV6.1 SV6.3 SV6.5 SV6.7 SV6.9 SV6.11 SV6.13 SV6.15 SV6.17 SV6.19 TS7800_CON.2 U$1.7 U$1.9 V7805_C4.2 V7805_C5.2 V7805_C6.2
GND7: 1.1 160.1 C34.- C35.- C36.- C37.- C38.- C39.- C40.- C41.- C42.- C43.- C44.- C45.- C46.- C47.- C48.- C49.- C50.- C51.- C52.- C53.- C54.- C55.- C56.- C57.- C58.- C59.- C60.- C61.- C62.- C63.- C64.- C65.- C66.- C67.- C68.- C69.- C70.- C71.- C72.- C73.- INPUT3.1 OUTPUT5.2 R6.2
GND8: 2.1 3.1 C74.- C75.- C76.- C77.- C78.- C79.- C80.- C81.- C82.- C83.- C84.- C85.- C86.- C87.- C88.- C89.- C90.- C91.- C92.- C93.- C94.- C95.- C96.- C97.- C98.- C99.- C100.- C101.- C102.- C103.- C104.- C105.- C106.- C107.- C108.- C109.- C110.- C111.- C112.- C113.- INPUT4.1 OUTPUT6.2 R13.2
GND9: R14.1 R15.1 R16.1 R17.1 R18.1 R19.1 R20.1 R21.1 R22.1 R23.1 R24.1 R25.1 R26.1 R27.1 R28.1 R29.1 R30.1 R31.1 U$14.2
GND10: IC10.12 POWER2.1 R32.1 U$16.3 U$17.3 U$18.4
GND11: IC11.12 POWER3.1 R33.1 U$20.3 U$21.3 U$22.4
IN1: LMC6484_1.3 SV1.1 U$6.1
IN2: LMC6484_1.5 SV1.2 U$6.2
IN3: LMC6484_1.10 SV1.3 U$6.3
IN4: LMC6484_1.12 SV1.4 U$6.4
IN5: ADC1.5 SV1.5 U$6.5
IN6: ADC1.6 SV1.6 U$6.6
IN7: ADC1.7 SV1.7 U$6.7
IN8: ADC1.8 SV1.8 U$6.9
IN9: ADC2.1 SV1.9 U$6.10
IN10: ADC2.2 SV1.10 U$6.11
IN11: ADC2.3 SV1.11 U$6.12
IN12: ADC2.4 SV1.12 U$6.13
IN13: ADC2.5 SV1.13 U$6.14
IN14: ADC2.6 SV1.14 U$6.15
IN15: ADC2.7 SV1.15 U$7.1
IN16: ADC2.8 SV1.16 U$7.2
IN17: ADC3.1 SV1.17 U$7.3
IN18: ADC3.2 SV1.18 U$7.4
IN19: ADC3.3 SV1.19 U$7.5
IN20: ADC3.4 SV1.20 U$7.6
IN21: ADC3.5 SV1.21 U$7.7
IN22: ADC3.6 SV1.22 U$7.9
IN23: ADC3.7 SV1.23 U$7.10
IN24: ADC3.8 SV1.24 U$7.11
IN25: ADC4.1 SV1.25 U$7.12
IN26: ADC4.2 SV1.26 U$7.13
IN27: ADC4.3 SV1.27 U$7.14
IN28: ADC4.4 SV1.28 U$7.15
IN29: ADC4.5 SV1.29 U$8.1
IN30: ADC4.6 SV1.30 U$8.2
IN31: ADC4.7 SV1.31 U$8.3
IN32: ADC4.8 U$2.1 U$8.5
IN33: IN1.2 R14.2 U$14.3
IN34: IN14.2 R27.2 U$14.16
IN35: IN15.2 R28.2 U$14.17
IN36: IN7.2 R20.2 U$14.9
IN37: IN11.2 R24.2 U$14.13
IN38: IN18.2 R31.2 U$14.20
IN39: IN16.2 R29.2 U$14.18
IN40: IN6.2 R19.2 U$14.8
IN41: IN5.2 R18.2 U$14.7
IN42: IN12.2 R25.2 U$14.14
IN43: IN13.2 R26.2 U$14.15
IN44: IN2.2 R15.2 U$14.4
IN45: IN3.2 R16.2 U$14.5
IN46: IN17.2 R30.2 U$14.19
IN47: IN10.2 R23.2 U$14.12
IN48: IN9.2 R22.2 U$14.11
IN49: IN8.2 R21.2 U$14.10
IN50: IN4.2 R17.2 U$14.6
N$1: IC2.1 R1.2 R2.1
N$2: U$1.6 V7805_C4.1
N$12: IC4.1 R7.2 R8.1
N$13: IC5.1 R9.2 R10.1
N$14: IC6.1 R11.2 R12.1
N$50: 160.2 OUT_OK.C
N$51: OUTPUT5.1 S2.3 S2.4
N$52: D1.A IN_OK.A INPUT3.2 X1.1
N$53: R6.1 S2.1 S2.6
N$54: 1.2 IN_OK.C
N$55: 2.2 OUT_OK1.C
N$56: OUTPUT6.1 S3.3 S3.4
N$57: D2.A IN_OK1.A INPUT4.2 X2.1
N$58: R13.1 S3.1 S3.6
N$59: 3.2 IN_OK1.C
N$60: IC10.2 U$15.1 U$17.1
N$61: IC10.4 R32.2
N$62: R32.3 U$16.2
N$63: OUTPUT7.2 U$17.2 U$17.4
N$64: IC10.5 U$18.1
N$65: IC11.2 U$19.1 U$21.1
N$66: IC11.4 R33.2
N$67: R33.3 U$20.2
N$68: OUTPUT8.2 U$21.2 U$21.4
N$69: IC11.5 U$22.1
SPI_CLK: ADC1.13 ADC2.13 ADC3.13 ADC4.13 SV2.10
SPI_CS1: ADC1.10 SV2.7
SPI_CS2: ADC2.10 SV2.6
SPI_CS3: ADC3.10 SV2.5
SPI_CS4: ADC4.10 SV2.4
SPI_DIN: ADC1.11 ADC2.11 ADC3.11 ADC4.11 SV2.8
SPI_DOUT: ADC1.12 ADC2.12 ADC3.12 ADC4.12 SV2.9
TS7800_+ [power]: TS7800_CON.1 U$1.5 V7805_C6.1
TS7800_EN [power]: S1.13 U$1.1 V7805_C5.1
VREF: 3V.2 6103CAP2.1 ADC1.15 ADC2.15 ADC3.15 ADC4.15 SV1.34
VREF1: 3V3.2 6103CAP8.1 SV5.2 SV5.4 SV5.6 SV5.8 SV5.10 SV5.12 SV5.14 SV5.16 SV5.18 SV5.20
VREF1_EN: 3V3.1 6103CAP7.1 S1.16
VREF2: 3V4.2 6103CAP10.1 SV4.2 SV4.4 SV4.6 SV4.8 SV4.10 SV4.12 SV4.14 SV4.16 SV4.18 SV4.20
VREF2_EN: 3V4.1 6103CAP9.1 S1.15
VREF3: 3V5.2 6103CAP12.1 SV6.2 SV6.4 SV6.6 SV6.8 SV6.10 SV6.12 SV6.14 SV6.16 SV6.18 SV6.20
VREF3_EN: 3V5.1 6103CAP11.1 S1.14